# Altium PCB PCB2.PcbDoc
Units mil, origin at the board's own origin, x right, y up, seen from the top; angles counter-clockwise.
Board outline 2581.5 x 1820.5 mil, 2 copper layers (Top Layer, Bottom Layer), stack 12.8 mil thick; 70 components, 49 nets, 206 pads, 43 vias.
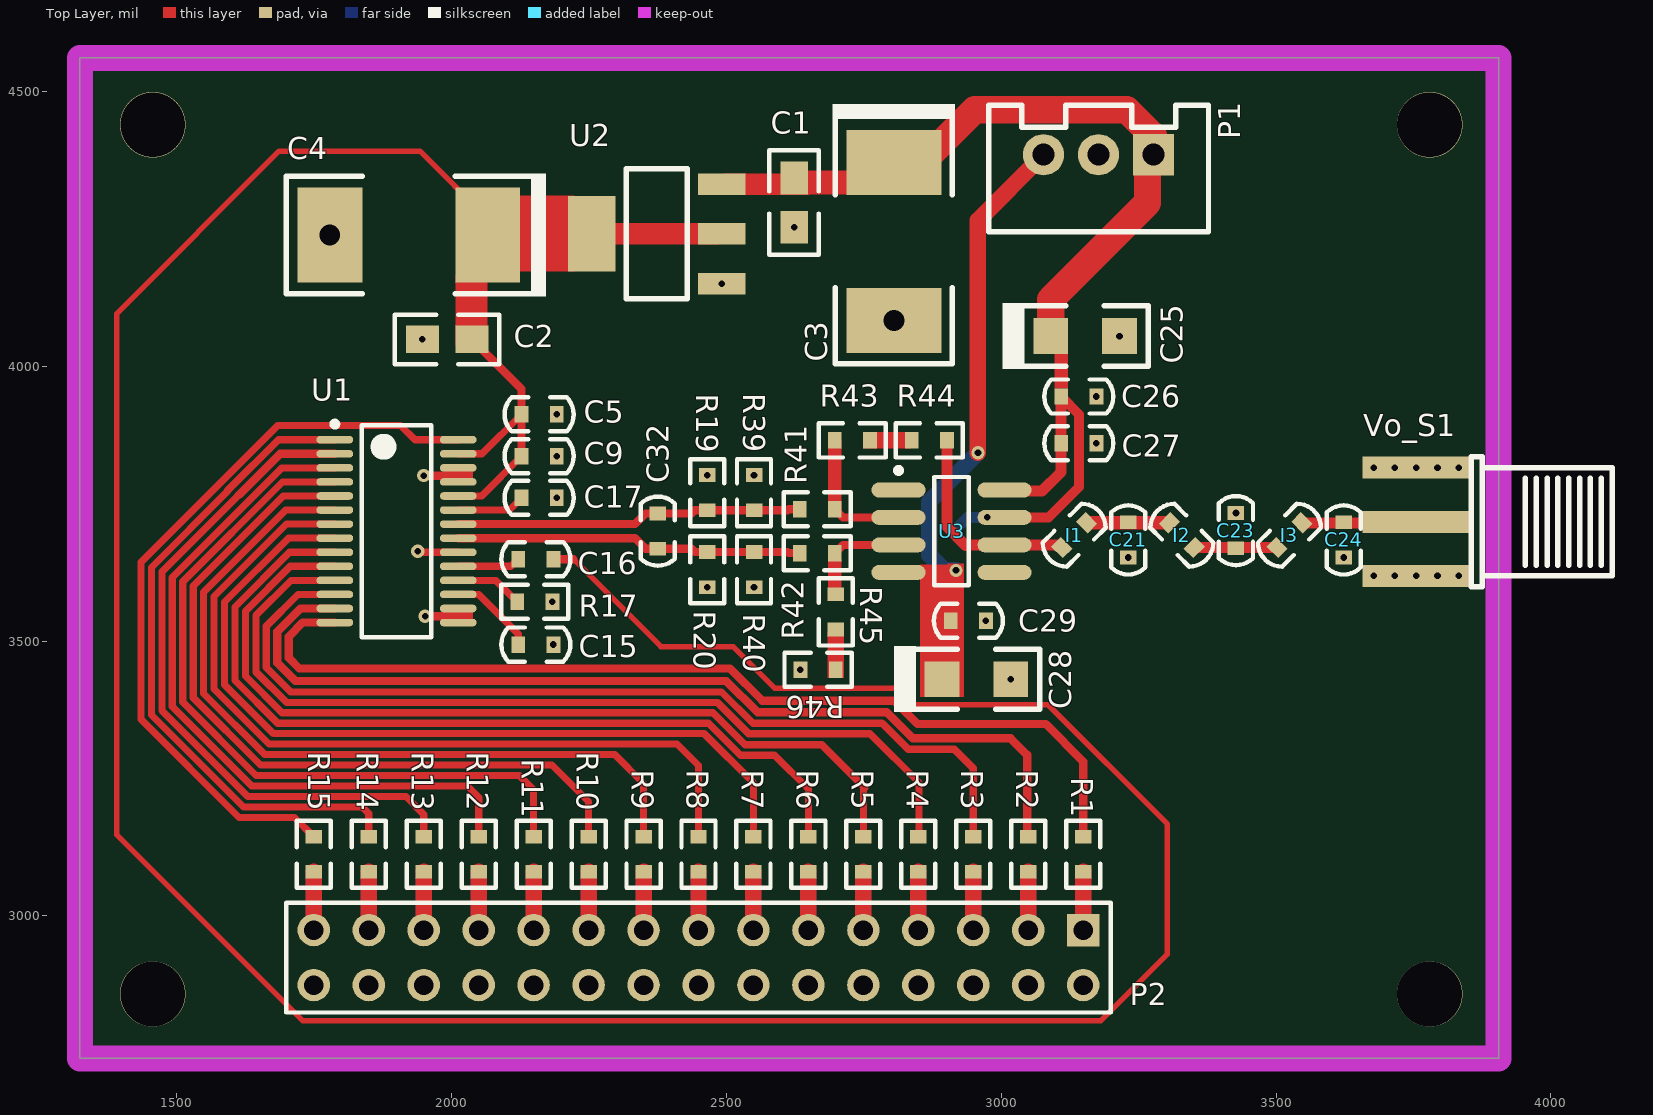
[diagram p0: Top Layer view]
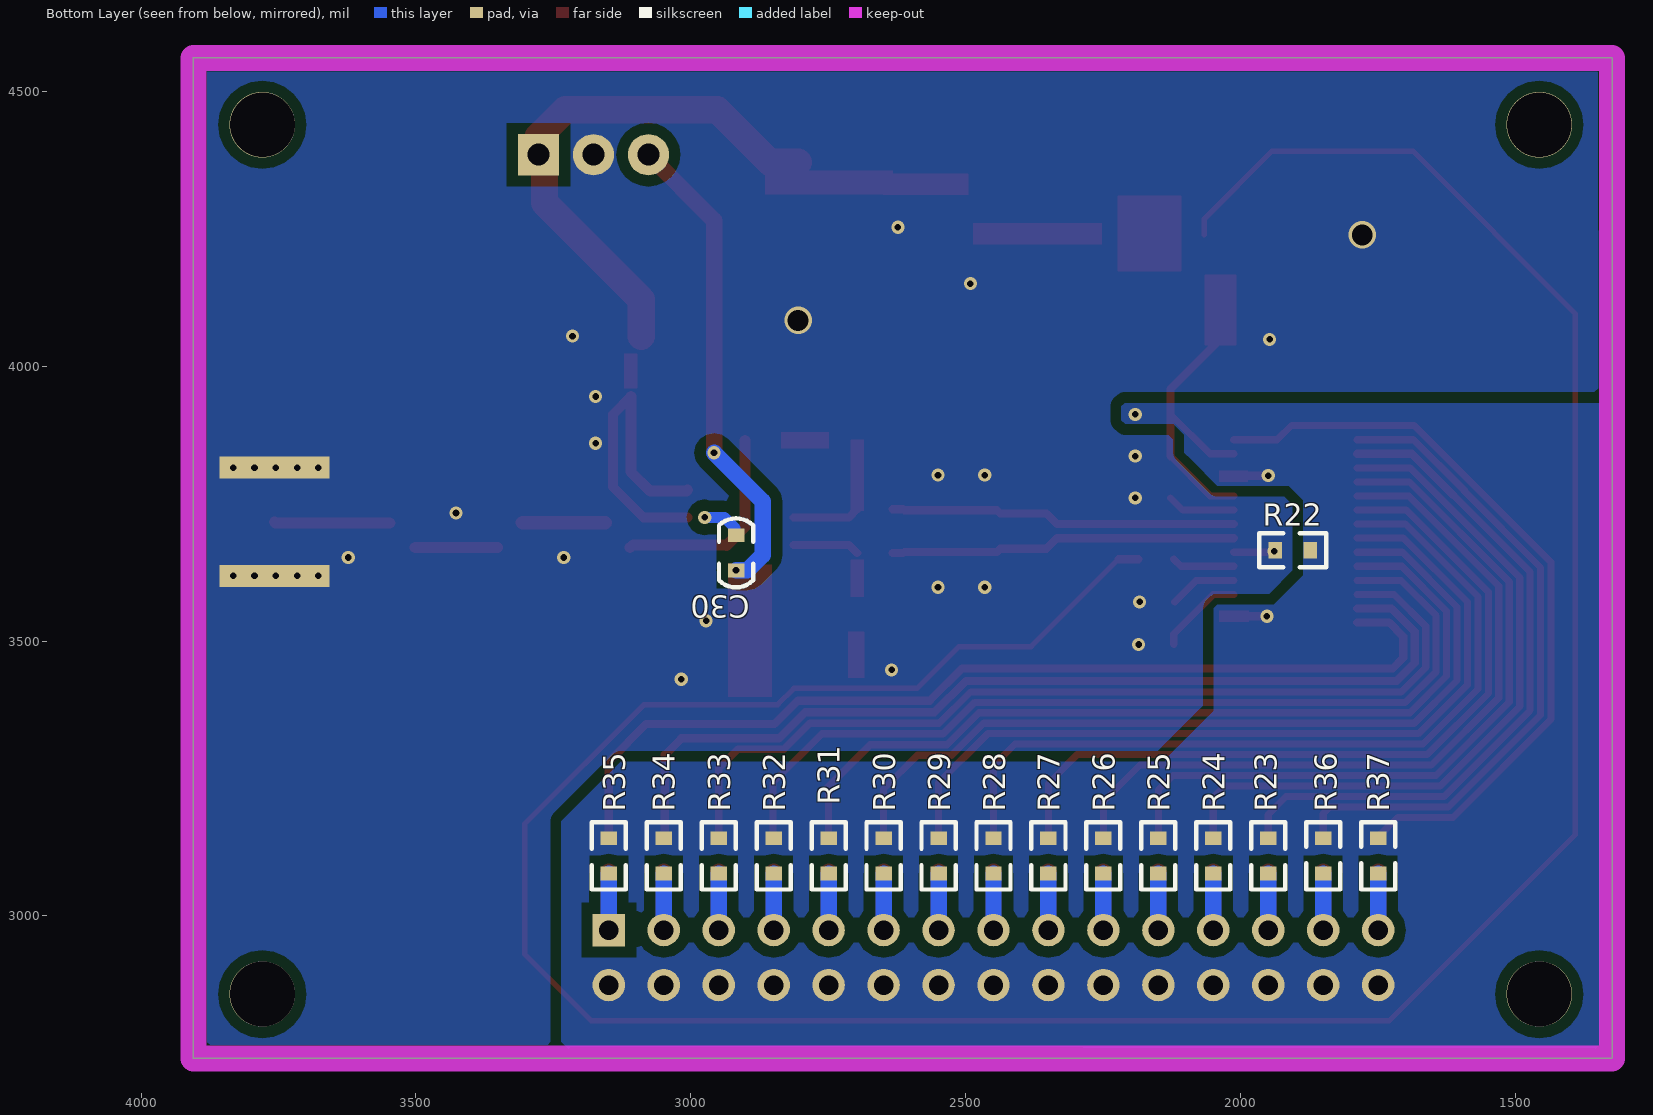
[diagram p1: Bottom Layer view, seen from below]

## Layer stack, top to bottom
Top Solder: solder mask 0.4, Solder Resist, Dk 3.5
Top Layer: signal copper 1.4
Dielectric 1: core 10, FR-4, Dk 4.2
Bottom Layer: signal copper 1.4
Bottom Solder: solder mask 0.4, Solder Resist, Dk 3.5

## Board outline
1323.5,2740.5 1323.5,4561 3905,4561 3905,2740.5

## Design rules (kind name [scope] priority, off if disabled: settings)
Clearance [All] p1: gap=6 except(20: Arc-Fill Arc-Poly Arc-Region Track-Fill Track-Poly Track-Region SMDPad-Fill SMDPad-Poly SMDPad-Region THPad-Fill THPad-Poly THPad-Region Via-Fill Via-Poly Via-Region Fill-Fill Fill-Poly Fill-Region Poly-Poly Poly-Region Region-Region)
DiffPairsRouting [All] p1: maxlimit=10 minlimit=10 mostfreqgap=10 toplayer_minwidth=15 toplayer_maxwidth=15 toplayer_prefwidth=15 bottomlayer_minwidth=15 bottomlayer_maxwidth=15 bottomlayer_prefwidth=15 maxuncoupledlength=500
PolygonConnect [All] p1: connectstyle=Direct reliefconductorwidth=10 reliefentries=4 polygonreliefangle="90 Angle" airgapwidth=10
RoutingVias [All] p1: holewidth=28 width=50 viastyle="Through Hole" minholewidth=28 minwidth=50 maxholewidth=28 maxwidth=50
SolderMaskExpansion [All] p1: expansion=4
Width [All] p1: maxlimit=100 minlimit=6 preferedwidth=30
29 further rules are at their usual default settings.

## Classes and differential pairs
differential pair IOUT: +IOUT_P -IOUT_N

## Components (designator, comment, footprint, x,y, rotation, side; value= is the part's Value field where it differs from the comment)
C1 "0.1uf" 0805 2623,4253 r90 top
C2 "0.1uf" 0805 1946.5,4049 r0 top
C3 "Cap" 7343C-TYPE_D 2804.5,4371 r90 top
C4 "Cap" 7343C-TYPE_D 2065.5,4239 r0 top
C5 "0.1uf" 0603C 2191,3912.5 r180 top
C9 "0.1uf" 0603C 2191,3836.5 r180 top
C15 "0.1uf" 0603C 2185,3493.67 r180 top
C16 "0.1uf" 0603C 2121,3649 r0 top
C17 "0.1uf" 0603C 2127,3760.5 r0 top
C21 "30p" 0603C 3231,3716 r270 top
C23 "30p" 0603C 3427,3733 r270 top
C24 "30p" 0603C 3623,3652 r90 top
C25 "6.8uf" 3216C-TYPE_A 3090,4055 r180 top
C26 "0.1uf" 0603C 3109,3945 r0 top
C27 "30p" 0603C 3109,3860 r0 top
C28 "6.8uF" 3216C-TYPE_A 2892,3430.5 r180 top
C29 "0.1uf" 0603C 2908,3537 r0 top
C30 "0.1uf" 0603C 2917.5,3628.5 r90 bottom
C32 "30p" 0603C 2375,3668 r90 top
I1 "Inductor" 0603C 3110,3670 r45 top
I2 "Inductor" 0603C 3305.87,3715.25 r315 top
I3 "Inductor" 0603C 3501.75,3670 r45 top
P1 "XH2.54-3p" XH2.54-3p 3277,4385 r180 top
P2 "Header 15X2" HDR2X15 3149,2974 r180 top
R1 "30R" 0603R 3149,3112 r90 top
R2 "30R" 0603R 3049,3112 r90 top
R3 "30R" 0603R 2949,3112 r90 top
R4 "30R" 0603R 2849,3112 r90 top
R5 "30R" 0603R 2749,3112 r90 top
R6 "30R" 0603R 2649,3112 r90 top
R7 "30R" 0603R 2549,3112 r90 top
R8 "30R" 0603R 2449,3112 r90 top
R9 "30R" 0603R 2349,3112 r90 top
R10 "30R" 0603R 2249,3112 r90 top
R11 "30R" 0603R 2149,3112 r90 top
R12 "30R" 0603R 2049,3112 r90 top
R13 "30R" 0603R 1949,3112 r90 top
R14 "30R" 0603R 1849,3112 r90 top
R15 "30R" 0603R 1749,3112 r90 top
R17 "50R" 0603R 2151.16,3571.33 r180 top
R19 "33R" 0603R 2465,3770 r270 top
R20 "30R" 0603R 2465,3630 r90 top
R22 "0" 0603R 1904.5,3665 r180 bottom
R23 "50R" 0603R 1949,3109 r90 bottom
R24 "50R" 0603R 2049,3109 r90 bottom
R25 "50R" 0603R 2149,3109 r90 bottom
R26 "50R" 0603R 2249,3109 r90 bottom
R27 "50R" 0603R 2349,3109 r90 bottom
R28 "50R" 0603R 2449,3109 r90 bottom
R29 "50R" 0603R 2549,3109 r90 bottom
R30 "50R" 0603R 2649,3109 r90 bottom
R31 "50R" 0603R 2749,3109 r90 bottom
R32 "50R" 0603R 2849,3109 r90 bottom
R33 "50R" 0603R 2949,3109 r90 bottom
R34 "50R" 0603R 3049,3109 r90 bottom
R35 "50R" 0603R 3149,3109 r90 bottom
R36 "50R" 0603R 1849,3109 r270 bottom
R37 "50R" 0603R 1749,3109 r270 bottom
R39 "220R" 0603R 2550,3770 r270 top
R40 "200R" 0603R 2550,3630 r90 top
R41 "50R" 0603R 2665,3740 r0 top
R42 "50R" 0603R 2665,3660 r0 top
R43 "390R" 0603R 2729,3865 r0 top
R44 "12R" 0603R 2869,3865 r0 top
R45 "390R" 0603R 2699,3553 r270 top
R46 "12R" 0603R 2666.5,3447.5 r180 top
U1 "DAC904E" TI-PW28_N 1899.5,3700 r0 top
U2 "AMS1117-3.3V" SOT-223 2373,4241 r0 top
U3 "OPA690IDR" TI-D8_M 2909.46,3700 r0 top
Vo_S1 "差分输出" SMA-LYING 3816,3721 r180 top

## Footprints (in the part's own frame and the unit in brackets; to place one, negate y for a bottom-side part, rotate by r counter-clockwise, add the part's x,y. Pads: shape width x height; smd on the part's side, far side on the other; paste and mask are expansions set on the pad)
0603C [mil]
  rect 25x30 smd: 1(0,0) 2(64,0)
  silkscreen extent -31,-31 95,31
0603R [mil]
  rect 25x30 smd: 1(-32,0) 2(32,0)
  silkscreen extent -61,-31 61,31
0805 [mil]
  rect 60x50 smd: 1(0,0) 2(90,0)
  silkscreen extent -50,-45 140,45
3216C-TYPE_A [mm]
  rect 1.6x1.65 smd: 1(0,0) 2(-3.175,0)
  silkscreen extent -4.51,-1.54 2.22,1.52
7343C-TYPE_D [mm]
  rect 3x4.4 smd: 1(0,0) 2(-7.3,0)
  silkscreen extent -9.31,-2.84 2.7,2.84
HDR2X15 [mm] "Connector; Header; 15x2 Position"
  rect 1.5x1.5 hole 0.9: 1(0,0)
  round 1.5 hole 0.9: 2(0,2.54) 3(2.54,0) 4(2.54,2.54) 5(5.08,0) 6(5.08,2.54) 7(7.62,0) 8(7.62,2.54) 9(10.16,0) 10(10.16,2.54) 11(12.7,0) 12(12.7,2.54) 13(15.24,0) 14(15.24,2.54) 15(17.78,0) 16(17.78,2.54) 17(20.32,0) 18(20.32,2.54) 19(22.86,0) 20(22.86,2.54) 21(25.4,0) 22(25.4,2.54) 23(27.94,0) 24(27.94,2.54) 25(30.48,0) 26(30.48,2.54) 27(33.02,0) 28(33.02,2.54) 29(35.56,0) 30(35.56,2.54)
  silkscreen extent -1.27,-1.27 36.83,3.81
SMA-LYING [mm]
  rect 5.08x1.016 smd: 0(1.5,0.1) 1(1.5,2.6) 1(1.5,-2.4)
  rect 5.08x1.016 smd far side: 1(1.5,2.6) 1(1.5,-2.4)
  silkscreen extent -7.5,-2.9 -1,3.1
SOT-223 [mm]
  rect 2.2x1 smd: 1(3,-2.3) 2(3,0) 3(3,2.3)
  rect 2.2x3.5 smd: 2(-3,0)
  silkscreen extent -1.4,-3 1.4,3, body extent -3.49,-3.24 3.49,3.24, height 1.64
TI-D8_M [mm] "SOIC, 8-Leads, Body 4.9x3.9mm, Pitch 1.27mm, IPC Low Density"
  oval 2.5x0.7 smd: 1(-2.45,1.905) 2(-2.45,0.635) 3(-2.45,-0.635) 4(-2.45,-1.905) 5(2.45,-1.905) 6(2.45,-0.635) 7(2.45,0.635) 8(2.45,1.905)
  silkscreen extent -2.57,-2.5 0.8,2.93, body extent -2,-2.5 2,2.5, height 1.75
TI-PW28_N [mm] "SOP, 28-Leads, Body 9.7x4.4mm, Pitch 0.65mm, IPC Medium Density"
  oval 1.7x0.35 smd: 1(-2.85,4.225) 2(-2.85,3.575) 3(-2.85,2.925) 4(-2.85,2.275) 5(-2.85,1.625) 6(-2.85,0.975) 7(-2.85,0.325) 8(-2.85,-0.325) 9(-2.85,-0.975) 10(-2.85,-1.625) 11(-2.85,-2.275) 12(-2.85,-2.925) 13(-2.85,-3.575) 14(-2.85,-4.225) 15(2.85,-4.225) 16(2.85,-3.575) 17(2.85,-2.925) 18(2.85,-2.275) 19(2.85,-1.625) 20(2.85,-0.975) 21(2.85,-0.325) 22(2.85,0.325) 23(2.85,0.975) 24(2.85,1.625) 25(2.85,2.275) 26(2.85,2.925) 27(2.85,3.575) 28(2.85,4.225)
  silkscreen extent -2.97,-4.9 1.6,5.07, body extent -2.25,-4.9 2.25,4.9, height 1.2
XH2.54-3p [mil]
  rect 75x75 hole 40: 1(0,0)
  round 75 hole 40: 2(100,0) 3(200,0)
  silkscreen extent -100,-90 300,140

## Part data
C1 C2 C5 C9 C15 C16 C17 C21 C23 C24 C26 C27 C29 C30 C32: library part Cap
C3 C4 C25 C28: library part "Tantalium Cap"
P2: "Header, 15-Pin, Dual row"
R1 R2 R3 R4 R5 R6 R7 R8 R9 R10 R11 R12 R13 R14 R15 R17 R19 R20 R22 R23 R24 R25 R26 R27 R28 R29 R30 R31 R32 R33 R34 R35 R36 R37 R39 R40 R41 R42 R43 R44 R45 R46: library part Res
U1: "14-Bit, 165 MSPS SpeedPlus(TM) DAC Scalable Current Outputs between 2 to 20 mA, -40 to 85 degC, 28-pin SOP (PW28), Green (RoHS & no Sb/Br)"
U3: "Wideband, Voltage Feedback Operational Amplifier with Disable, 5 to 12 V, -40 to 85 degC, 8-pin SOIC (D8), Green (RoHS & no Sb/Br)"
Vo_S1: library part SMA

## Via types
v1: diameter 24, hole 12, Top Layer to Bottom Layer, 37 vias
v2: diameter 118.5, hole 118.11, Top Layer to Bottom Layer, 4 vias
v3: diameter 50, hole 38, Top Layer to Bottom Layer, 2 vias

## Nets (pads, with @x,y where several pads share a name; then routed paths per layer and width w, separated by ;. In a path a pad name is that pad's centre, name@x,y a point inside that pad or via, vN(x,y) a via of type N, cw(c..) or ccw(c..) an arc to the next point about the centre after c; other vN are vias at no path point)
3.3V: C2.2 C4.1 C5.2 C9.2 C16.2 U1.24 U1.27 U2.2 | length 6021.6
  Top Layer w10: C4.1 2065.5,4268 1942,4391.5 1686,4391.5 1390,4095.5 1390,3148 1728.5,2809.5 3181,2809.5 3302,2930.5 3302,3167 3084.5,3384.5 2841.7,3384.5 2812.2,3414 2588,3414 2512,3490 2380.5,3490 2221.5,3649
  Top Layer w13: U1.24 2054.48,3763.98 C9.2 ; U1.27 2055.25,3840.75 C5.2
  Top Layer w15: C2.2 2127,3958.5 C5.2 C9.2 ; C16.2 2221.5,3649
5V: C1.2 C3.1 C25.1 C26.1 C27.1 C30.2 P1.1 U2.3 U3.7 U3.8 | length 1628.5
  Top Layer w18: U3.7 3086,3725 3141.5,3780.5 3141.5,3912.5 C26.1
  Top Layer w20: U3.8 3007.91,3773 3074,3773 3109,3808 C27.1 C26.1
  Top Layer w50: C3.1 2856,4371 2952,4467 3228,4467 3277,4418 P1.1 3266,4374 3266,4297.5 3090,4121.5 C25.1
  Bottom Layer w20: 2919,3705.5 2938.5,3725 v1(2974.5,3725)
-5V: C28.1 C29.1 C30.1 P1.3 U3.4 | length 987.9
  Top Layer w30: C28.1 2892,3521 C29.1 ; v1(2957.5,3842.5) 2957.5,4265.5 P1.3
  Bottom Layer w30: v1(2917.5,3628.5) 2897,3628.5 2869,3656.5 2869,3754 v1(2957.5,3842.5)
AGND: C1.1 C2.1 C3.2 C4.2 C9.1 C15.1 C17.2 C21.2 C23.1 C24.1 C25.2 C26.2 C27.2 C28.2 C29.2 P1.2 R17.1 R19.1 R20.1 R22.1 R39.1 R40.1 R46.2 U1.20 U2.1 Vo_S1.1 | length 74.5
  Top Layer w13: v1(1938,3663.5) 1939.89,3661.61 U1.20
  other v1: 3017,3430.5 2634.5,3447.5 2185,3493.67 2972,3537 2183.16,3571.33 2465,3598 2550,3598 3677.5,3618.64 3716.25,3618.64 3755,3618.64 3793.75,3618.64 3832.5,3618.64 3231,3652 3623,3652 3427,3733 2191,3760.5 2465,3802 2550,3802 3677.5,3815.49 3716.25,3815.49 3755,3815.49 3793.75,3815.49 3832.5,3815.49 2191,3836.5 3173,3860 3173,3945 1946.5,4049 3215,4055 2491.11,4150.45 2623,4253
  other v3: 2804.5,4083.6 1778.1,4239
CLK: P2.29 R15.1 R37.2 | length 209
  Top Layer w30: P2.29 R15.1
  Bottom Layer w30: P2.29 R37.2
D0: P2.1 R1.1 R35.1 | length 209
  Top Layer w30: P2.1 R1.1
  Bottom Layer w30: P2.1 R35.1
D1: P2.3 R2.1 R34.1 | length 209
  Top Layer w30: P2.3 R2.1
  Bottom Layer w30: P2.3 R34.1
D2: P2.5 R3.1 R33.1 | length 209
  Top Layer w30: P2.5 R3.1
  Bottom Layer w30: P2.5 R33.1
D3: P2.7 R4.1 R32.1 | length 209
  Top Layer w30: P2.7 R4.1
  Bottom Layer w30: P2.7 R32.1
D4: P2.9 R5.1 R31.1 | length 209
  Top Layer w30: P2.9 R5.1
  Bottom Layer w30: P2.9 R31.1
D5: P2.11 R6.1 R30.1 | length 209
  Top Layer w30: P2.11 R6.1
  Bottom Layer w30: P2.11 R30.1
D6: P2.13 R7.1 R29.1 | length 209
  Top Layer w30: P2.13 R7.1
  Bottom Layer w30: P2.13 R29.1
D7: P2.15 R8.1 R28.1 | length 209
  Top Layer w30: P2.15 R8.1
  Bottom Layer w30: P2.15 R28.1
D8: P2.17 R9.1 R27.1 | length 209
  Top Layer w30: P2.17 R9.1
  Bottom Layer w30: P2.17 R27.1
D9: P2.19 R10.1 R26.1 | length 209
  Top Layer w30: P2.19 R10.1
  Bottom Layer w30: P2.19 R26.1
D10: P2.21 R11.1 R25.1 | length 209
  Top Layer w30: P2.21 R11.1
  Bottom Layer w30: P2.21 R25.1
D11: P2.23 R12.1 R24.1 | length 209
  Top Layer w30: P2.23 R12.1
  Bottom Layer w30: P2.23 R24.1
D12: P2.25 R13.1 R23.1 | length 209
  Top Layer w30: P2.25 R13.1
  Bottom Layer w30: P2.25 R23.1
D13: P2.27 R14.1 R36.2 | length 209
  Top Layer w30: P2.27 R14.1
  Bottom Layer w30: P2.27 R36.2
DGND: C5.1 P2.2 P2.4 P2.6 P2.8 P2.10 P2.12 P2.14 P2.16 P2.18 P2.20 P2.22 P2.24 P2.26 P2.28 P2.30 R22.2 R23.2 R24.2 R25.2 R26.2 R27.2 R28.2 R29.2 R30.2 R31.2 R32.2 R33.2 R34.2 R35.2 R36.1 R37.1 U1.15 U1.16 U1.25 U1.26 | length 122.2
  Top Layer w15: v1(1949,3801) 2003,3801 2006,3798 ; v1(1951.5,3545) 2010.5,3545 2014,3548.5
  other v1: 2191,3912.5
IOUT_N: C32.1 R20.2 R40.2 R42.1 U1.21 | length 632.6
  Top Layer w15: U1.21 2333.3,3687.2 2352.5,3668 C32.1 2436.5,3668 2442.5,3662 R20.2 R40.2 2611,3662 2613,3660 R42.1
IOUT_P: C32.2 R19.2 R39.2 R41.1 U1.22 | length 632.6
  Top Layer w15: U1.22 2333.3,3712.8 2352.5,3732 C32.2 2436.5,3732 2442.5,3738 R19.2 R39.2 2611,3738 2613,3740 R41.1
NetC15_2: C15.2 U1.17 | length 158.4
  Top Layer w13: U1.17 2049.16,3584.84 2121,3513 C15.2
NetC16_1: C16.1 U1.19 | length 114.7
  Top Layer w13: U1.19 2108.02,3636.02 C16.1
NetC17_1: C17.1 U1.23 | length 124.5
  Top Layer w13: U1.23 2104.89,3738.39 C17.1
NetC21_1: C21.1 I1.2 I2.1 | length 150.6
  Top Layer w25: I1.2 I2.1
NetC23_2: C23.2 I2.2 I3.1 | length 150.6
  Top Layer w20: I2.2 I3.1
NetC24_2: C24.2 I3.2 Vo_S1.0 | length 210.7
  Top Layer w20: I3.2 3755.14,3715.25 Vo_S1.0
NetI1_1: I1.1 R44.2 U3.6 | length 382.6
  Top Layer w20: R44.2 2901,3708 2935,3674 2936,3675 U3.6 3105,3675 I1.1
NetR1_2: R1.2 U1.14 | length 1794.1
  Top Layer w15: U1.14 1728.66,3533.66 1703.5,3508.5 1703.5,3469 1722.5,3450 2506.5,3450 2565,3391.5 2805,3391.5 2847.5,3349 3081,3349 3149,3281 R1.2
NetR2_2: R2.2 U1.13 | length 1762.7
  Top Layer w15: U1.13 1724.55,3559.25 1682.5,3517.2 1682.5,3460.3 1715.3,3427.5 2499.3,3427.5 2556.3,3370.5 2791.5,3370.5 2839,3323 3017,3323 3047,3293 3047,3146 R2.2
NetR3_2: R3.2 U1.12 | length 1710.8
  Top Layer w13: U1.12 1720.34,3584.84 1662.5,3527 1662.5,3452.02 1707.02,3407.5 2491.02,3407.5 2548.02,3350.5 2783.22,3350.5 2830.72,3303 2914.5,3303 2949,3268.5 R3.2
NetR4_2: R4.2 U1.11 | length 1661.6
  Top Layer w13: U1.11 1707.43,3610.43 1643.5,3546.5 1643.5,3444.15 1699.15,3388.5 2483.15,3388.5 2540.4,3331.25 2761.25,3331.25 2850,3242.5 2850,3145 R4.2
NetR5_2: R5.2 U1.10 | length 1619.5
  Top Layer w13: U1.10 1706.15,3636.02 1624.5,3554.37 1624.5,3436.28 1691.28,3369.5 2475.28,3369.5 2533.53,3311.25 2673.25,3311.25 2751.5,3233 2749,3230.5 R5.2 R5.2@2751.5,3146.5
NetR6_2: R6.2 U1.9 | length 1568.9
  Top Layer w13: U1.9 1704.87,3661.61 1605.5,3562.24 1605.5,3428.41 1683.41,3350.5 2467.41,3350.5 2525.66,3292.25 2587.5,3292.25 2649,3230.75 R6.2
NetR7_2: R7.2 U1.8 | length 1533.9
  Top Layer w13: U1.8 1702.7,3687.2 1586.5,3571 1586.5,3420.54 1675.54,3331.5 2459.54,3331.5 2549,3242.04 R7.2
NetR8_2: R8.2 U1.7 | length 1511.4
  Top Layer w13: U1.7 1699.3,3712.8 1567.5,3581 1567.5,3412.67 1667.67,3312.5 2410,3312.5 2449,3273.5 R8.2
NetR9_2: R9.2 U1.6 | length 1450.1
  Top Layer w13: U1.6 1698.02,3738.39 1548.5,3588.87 1548.5,3404.8 1659.8,3293.5 2296.5,3293.5 2349,3241 R9.2
NetR10_2: R10.2 U1.5 | length 1390.5
  Top Layer w13: U1.5 1693.48,3763.98 1529.5,3600 1529.5,3396.93 1651.93,3274.5 2182.5,3274.5 2249,3208 R10.2
NetR11_2: R11.2 U1.4 | length 1361.3
  Top Layer w13: U1.4 1692.07,3789.57 1510.5,3608 1510.5,3389.06 1644.06,3255.5 2123,3255.5 2148.5,3230 R11.2@2148.5,3144.5 ; R11.2@2148.5,3144.25 R11.2@2148.5,3144.5 ; R11.2 R11.2@2148.5,3144.5
NetR12_2: R12.2 U1.3 | length 1310.7
  Top Layer w13: U1.3 1690.79,3815.16 1491.5,3615.87 1491.5,3381.19 1636.19,3236.5 1700.5,3236.5 1701,3236 2028.5,3236 2049,3215.5 R12.2
NetR13_2: R13.2 U1.2 | length 1251.6
  Top Layer w13: 1612.5,3766 1472.5,3626 1472.5,3373.32 1628.82,3217 1916.5,3217 1949,3184.5 R13.2
  Top Layer w15: 1612.5,3766 1687.25,3840.75 U1.2
NetR14_2: R14.2 U1.1 | length 1211.2
  Top Layer w13: U1.1 1684.55,3866.34 1592.5,3774.28 1592.5,3772.87 1453.5,3633.87 1453.5,3365.45 1620.95,3198 1837,3198 1849,3186 R14.2
NetR15_2: R15.2 U1.28 | length 1380.1
  Top Layer w13: R15.2 1714,3179 1613.08,3179 1434.5,3357.58 1434.5,3643.5 1683.5,3892.5 1907,3892.5 1933.16,3866.34 U1.28
NetR17_2: R17.2 U1.18 | length 123.7
  Top Layer w13: U1.18 2080.06,3610.43 R17.2
NetR41_2: R41.2 R43.1 U3.2 | length 122.2
  Top Layer w15: R41.2 2712,3725 U3.2
NetR42_2: R42.2 R45.1 U3.3 | length 122.2
  Top Layer w15: R42.2 2712,3675 U3.3
NetR43_2: R43.2 R44.1
NetR45_2: R45.2 R46.1
pads on no net: U3.1 U3.5
copper on no net:
  other v2: 1456,2857.5 3779.5,2857.5 1456,4439.5 3779.5,4439.5

## Polygon pours and split planes (outlines as drawn)
AGND on Bottom Layer "Top Layer-No Net" (solid, pour order 16): 1346,2765.08 3874.58,2765.08 3877.5,2768 3879.5,2770 3879.5,4535.5 1350.5,4535.5 1349.5,4536.5
DGND on Bottom Layer "Top Layer-No Net" (solid, pour order 10): 1346,2758 3219.5,2761.5 3223,2758 3235.5,2770.5 3235.5,3168 3235.5,3172 3170,3237.5 3127.5,3280 2136.5,3280 2136.5,3285 2062,3359.5 2048,3373.5 2048,3557.5 2048,3559.5 2041.5,3566 1975.5,3566 1939,3566 1885,3620 1885,3708 1885,3756.5 1910,3781.5 1911.5,3783 2034,3783 2042,3783 2088.5,3829.5 2102,3843 2102,3874.5 2102,3875.5 2120.5,3894 2121.5,3895 2200.5,3895 2216.5,3895 2216.5,3927 2210.5,3933 1346,3933

## Keep-outs
Keep-Out Layer:
  the board outline again, w47.24

## Other copper
Top Layer:
  rectangle net DGND: 1984,3534.5 2039,3556
  rectangle net DGND: 1985.5,3789.5 2039,3810.5
  rectangle net NetR42_2: 2684.5,3580.5 2709.5,3648.5
  rectangle net NetR45_2: 2684,3432.5 2714,3517
  rectangle net NetR43_2: 2748.5,3850 2835.5,3880
  rectangle net NetR41_2: 2684.5,3736.5 2709.5,3866.5
  rectangle net -5V: 2902,3615.5 2932,3641.5
  rectangle net 3.3V: 2006.5,4038 2065.5,4167
  rectangle net 3.3V: 2107,4172.5 2223.5,4310.5
  rectangle net 5V: 3096.5,3959.5 3121.5,4023
  rectangle net -5V: 2852,3398 2932,3639
  rectangle net 5V: 2494.5,4312 2651,4351
  rectangle net 5V: 2632,4313 2864.5,4356
  rectangle net 3.3V: 2252,4221.5 2486,4260.5